# EAGLE board T35_ROMBOARD_v1.10 (EAGLE 6.4)
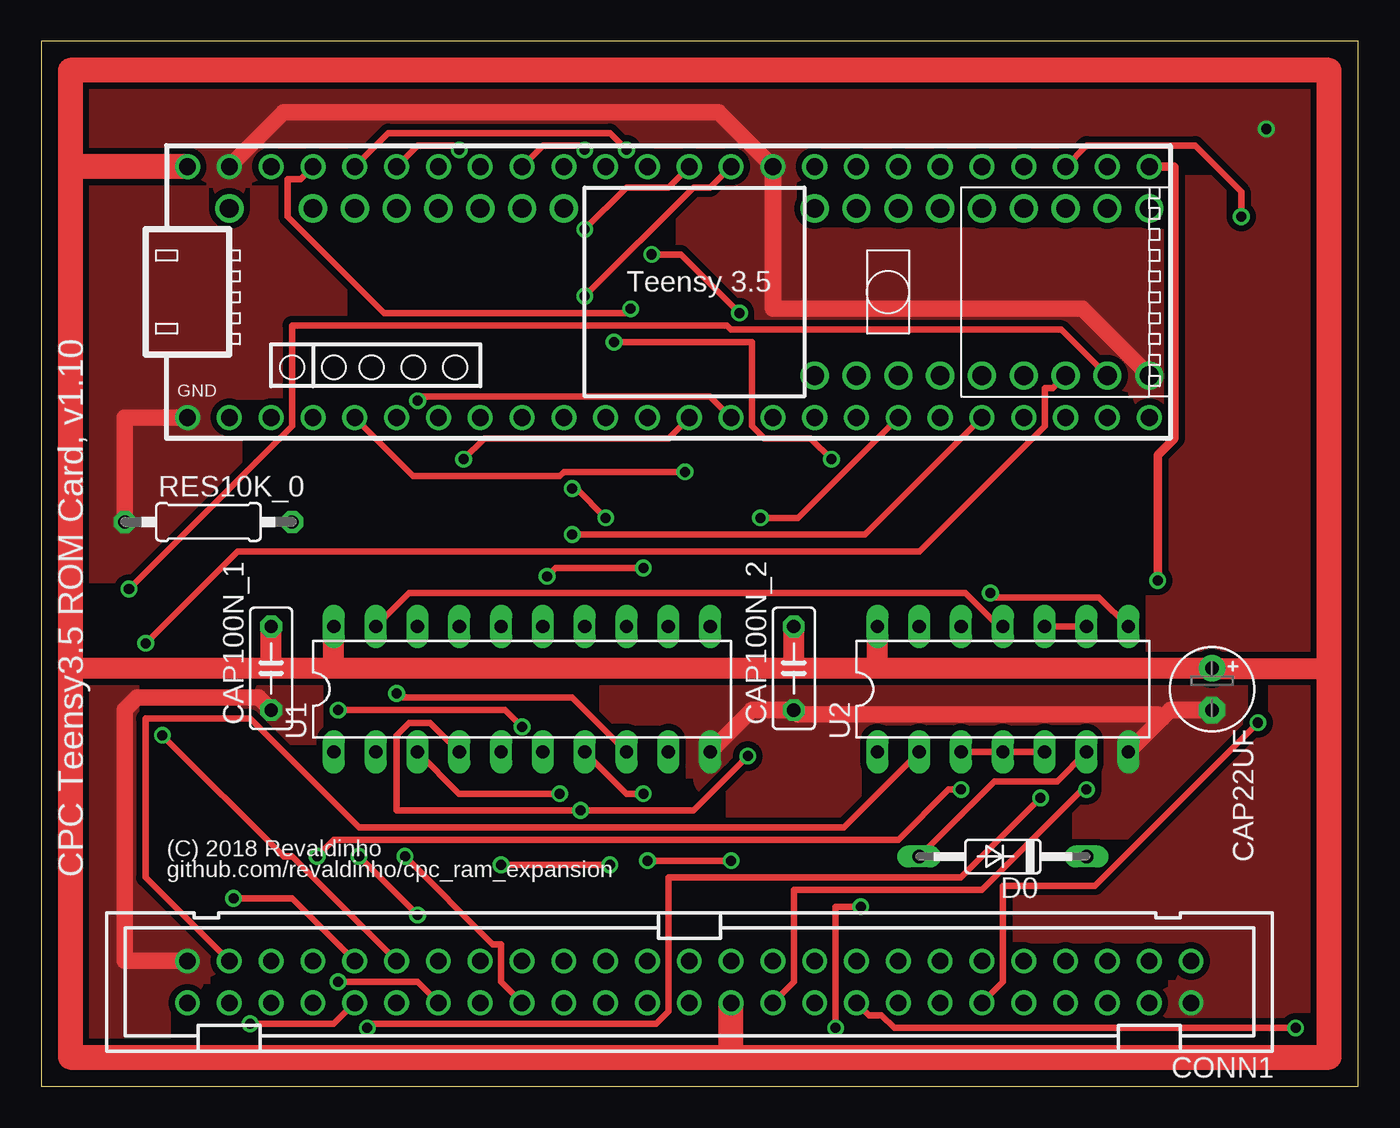
[diagram p0: board, top side]
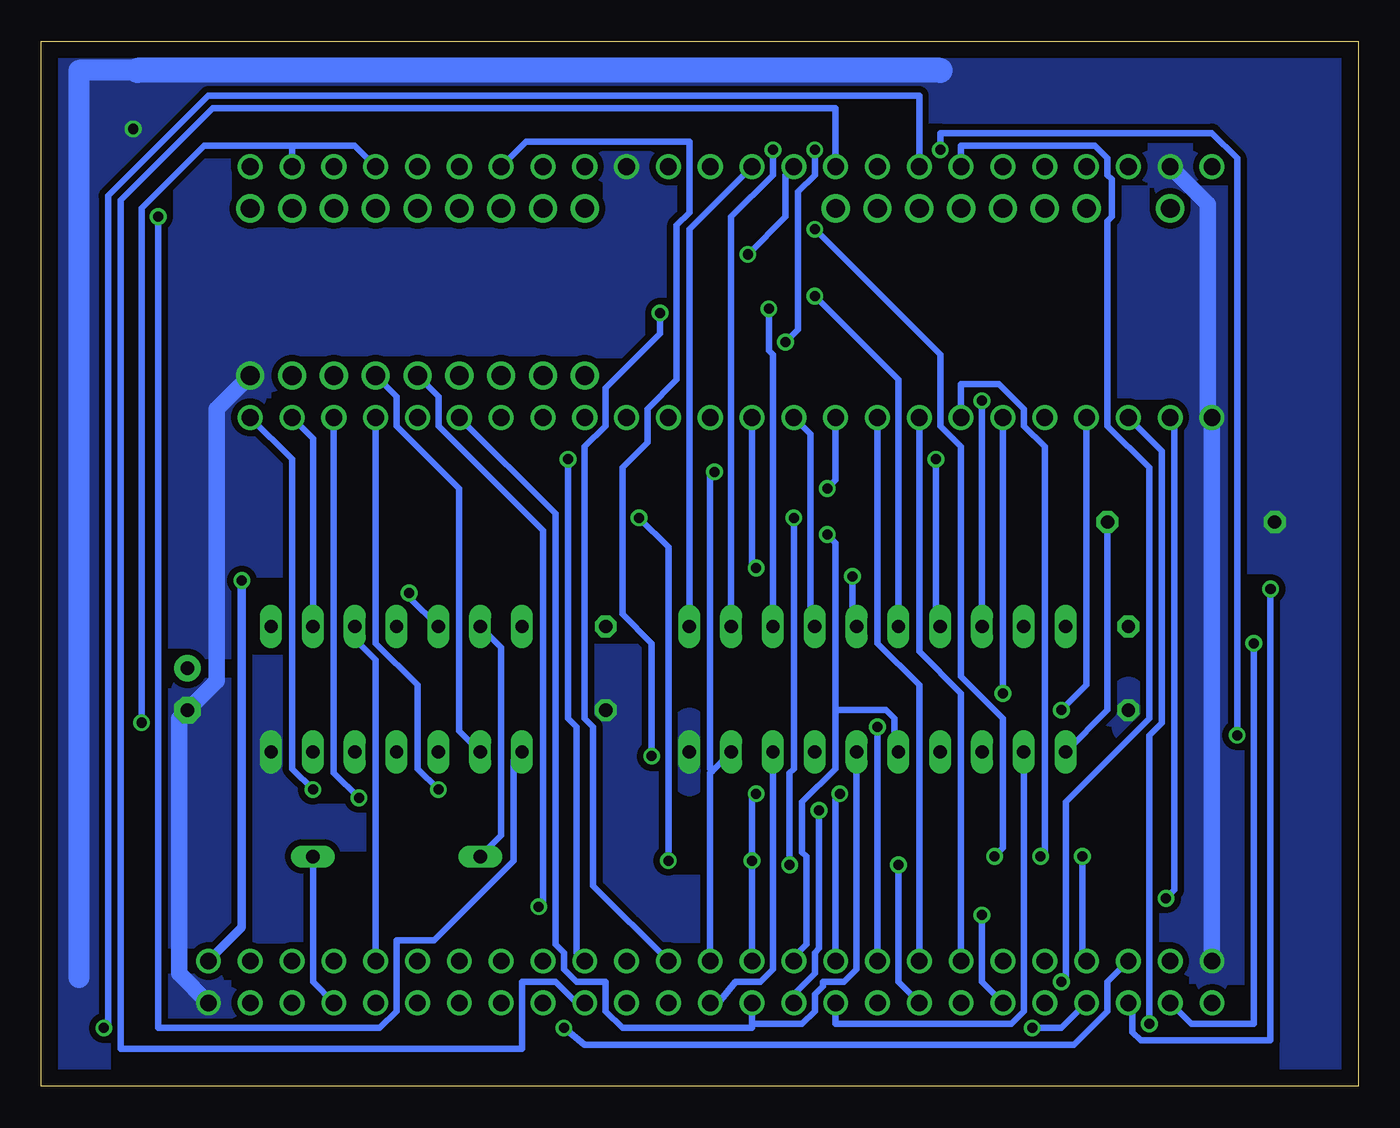
[diagram p1: board, bottom side, seen from below]

Size 80.01 x 63.5 mm. Coordinates in mm from the lower left corner, seen from the top.
Outline: 0,0 80.01,0 80.01,63.5 0,63.5 0,0
Copper layers (1*16): Top 0.035mm / dielectric 1.5mm / Bottom 0.035mm
Design rules "default": minimum track width 10mil, minimum drill 24mil, track to track 8mil, track to pad 8mil, pad to pad 8mil, via to via 8mil, smd to smd 8mil, copper to edge 40mil, drill to drill 8mil, minimum pad ring 10mil, minimum via ring 8mil, stop-mask expansion 4mil, vias tented up to drill 0mil, thermal gap 10mil
Net classes: 0 signal: width 0.381 mm, clearance 0.254 mm; 1 supply: width 1.016 mm, clearance 0.381 mm

## Footprints (pad centres in the part's own frame; a part is rotated, then mirrored left to right if it is on the bottom)
E2,5-5 = drill 0.813 pad 1.6: + -1.27,0 | drill 0.813 pad 1.6 octagon: - 1.27,0
C050-025X075 = drill 0.813 octagon: 1 -2.54,0; 2 2.54,0
PAK100/2500-50 = drill 1 pad 1.422: 1 -30.48,-1.27; 2 -30.48,1.27; 3 -27.94,-1.27; 4 -27.94,1.27; 5 -25.4,-1.27; 6 -25.4,1.27; 7 -22.86,-1.27; 8 -22.86,1.27; 9 -20.32,-1.27; 10 -20.32,1.27; 11 -17.78,-1.27; 12 -17.78,1.27; 13 -15.24,-1.27; 14 -15.24,1.27; 15 -12.7,-1.27; 16 -12.7,1.27; 17 -10.16,-1.27; 18 -10.16,1.27; 19 -7.62,-1.27; 20 -7.62,1.27; 21 -5.08,-1.27; 22 -5.08,1.27; 23 -2.54,-1.27; 24 -2.54,1.27; 25 0,-1.27; 26 0,1.27; 27 2.54,-1.27; 28 2.54,1.27; 29 5.08,-1.27; 30 5.08,1.27; 31 7.62,-1.27; 32 7.62,1.27; 33 10.16,-1.27; 34 10.16,1.27; 35 12.7,-1.27; 36 12.7,1.27; 37 15.24,-1.27; 38 15.24,1.27; 39 17.78,-1.27; 40 17.78,1.27; 41 20.32,-1.27; 42 20.32,1.27; 43 22.86,-1.27; 44 22.86,1.27; 45 25.4,-1.27; 46 25.4,1.27; 47 27.94,-1.27; 48 27.94,1.27; 49 30.48,-1.27; 50 30.48,1.27
DO35-10 = drill 0.813 long: A 5.08,0; C -5.08,0
0207/10 = drill 0.813 octagon: 1 -5.08,0; 2 5.08,0
TEENSY_35_NOXPINS = drill 1.016: 3V3 7.62,-7.62; 3V3_250MA -22.86,7.62; AGND -25.4,7.62; DAC0 12.7,7.62; DAC1 10.16,7.62; GND -27.94,-7.62; GND2 7.62,7.62; P0 -25.4,-7.62; P1 -22.86,-7.62; P2 -20.32,-7.62; P3 -17.78,-7.62; P4 -15.24,-7.62; P5 -12.7,-7.62; P6 -10.16,-7.62; P7 -7.62,-7.62; P8 -5.08,-7.62; P9 -2.54,-7.62; P10 0,-7.62; P11 2.54,-7.62; P12 5.08,-7.62; P13 5.08,7.62; P14 2.54,7.62; P15 0,7.62; P16 -2.54,7.62; P17 -5.08,7.62; P18 -7.62,7.62; P19 -10.16,7.62; P20 -12.7,7.62; P21 -15.24,7.62; P22 -17.78,7.62; P23 -20.32,7.62; P24 10.16,-7.62; P25 12.7,-7.62; P26 15.24,-7.62; P27 17.78,-7.62; P28 20.32,-7.62; P29 22.86,-7.62; P30 25.4,-7.62; P31 27.94,-7.62; P32 30.48,-7.62; P33 30.48,7.62; P34 27.94,7.62; P35 25.4,7.62; P36 22.86,7.62; P37 20.32,7.62; P38 17.78,7.62; P39 15.24,7.62; VIN -27.94,7.62 | drill 1.143: 3V3_1 30.48,5.08; A10 -17.78,5.08; A11 -15.24,5.08; AREF -20.32,5.08; GND5 30.48,-5.08; NC1 17.78,5.08; NC2 17.78,-5.08; P40 10.16,-5.08; P41 12.7,-5.08; P42 15.24,-5.08; P43 20.32,-5.08; P44 22.86,-5.08; P45 25.4,-5.08; P46 27.94,-5.08; P47 27.94,5.08; P48 25.4,5.08; P49 22.86,5.08; P50 20.32,5.08; P51 15.24,5.08; P52 12.7,5.08; P53 10.16,5.08; P54 -5.08,5.08; P55 -7.62,5.08; P56 -10.16,5.08; P57 -12.7,5.08; VUSB -25.4,5.08
DIL20 = drill 0.813 long: 1 -11.43,-3.81; 2 -8.89,-3.81; 3 -6.35,-3.81; 4 -3.81,-3.81; 5 -1.27,-3.81; 6 1.27,-3.81; 7 3.81,-3.81; 8 6.35,-3.81; 9 8.89,-3.81; 10 11.43,-3.81; 11 11.43,3.81; 12 8.89,3.81; 13 6.35,3.81; 14 3.81,3.81; 15 1.27,3.81; 16 -1.27,3.81; 17 -3.81,3.81; 18 -6.35,3.81; 19 -8.89,3.81; 20 -11.43,3.81
DIL14 = drill 0.813 long: 1 -7.62,-3.81; 2 -5.08,-3.81; 3 -2.54,-3.81; 4 0,-3.81; 5 2.54,-3.81; 6 5.08,-3.81; 7 7.62,-3.81; 8 7.62,3.81; 9 5.08,3.81; 10 2.54,3.81; 11 0,3.81; 12 -2.54,3.81; 13 -5.08,3.81; 14 -7.62,3.81

## Placement (x,y rotation side)
CAP22UF  [E2,5-5]  71.12,24.13 270 top
CAP100N_1  [C050-025X075]  13.97,25.4 90 top
CAP100N_2  [C050-025X075]  45.72,25.4 90 top
CONN1  [PAK100/2500-50]  39.37,6.35 180 top
D0  [DO35-10]  58.42,13.97 180 top
RES10K_0  [0207/10]  10.16,34.29 0 top
U0  [TEENSY_35_NOXPINS]  36.83,48.26 0 top
U1  [DIL20]  29.21,24.13 0 top
U2  [DIL14]  58.42,24.13 0 top

## Library data of the parts
CAP22UF CAP100N_1 CAP100N_2 RES10K_0 = resistor
CONN1 = con-3m
D0 = diode
U0 = Teensy35
U1 U2 = ic-package

## Nets
A0: CONN1.33 U0.P2
A1: CONN1.34 U0.P14
A2: CONN1.35 U0.P7
A3: CONN1.36 U0.P8
A4: CONN1.37 U0.P6
A5: CONN1.38 U0.P20
A6: CONN1.39 U0.P21
A7: CONN1.40 U0.P5
A8: CONN1.41 U0.P0
A9: CONN1.42 U0.P1
A10: CONN1.43 U0.P29
A11: CONN1.44 U0.P30
A12: CONN1.45 U0.P43
A13: CONN1.46 U0.P46
A14: CONN1.47 U0.P44 U2.2
A15: CONN1.48 U0.P45
BUFOE_B: U1.19 U2.11
BUSACK_B: CONN1.13
BUSRESET_B: CONN1.11
BUSRQ_B: CONN1.14
CLK: CONN1.1 U0.P33
CURSOR: CONN1.5
D0: CONN1.25 U0.P3 U1.9
D1: CONN1.26 U0.P4 U1.8
D2: CONN1.27 U0.P26 U1.7
D3: CONN1.28 U0.P27 U1.6
D4: CONN1.29 U0.P28 U1.5
D5: CONN1.30 U0.P39 U1.4
D6: CONN1.31 U1.3
D7: CONN1.32 U1.2
DOUT0: U0.P15 U1.11
DOUT1: U0.P22 U1.12
DOUT2: U0.P23 U1.13
DOUT3: U0.P9 U1.14
DOUT4: U0.P10 U1.15
DOUT5: U0.P13 U1.16
DOUT6: U0.P11 U1.17
DOUT7: U0.P12 U1.18
EXP_B: CONN1.3
HALT_B: CONN1.17
INT_B: CONN1.16
IOREQ_B: CONN1.20 U0.P17
LPEN: CONN1.4
M1_B: CONN1.22 U0.P32
MREQ_B: CONN1.23 U0.P16
NMI_B: CONN1.15
RAMDIS: CONN1.6
RAMRD_B: CONN1.7
RD_B: CONN1.19 U0.P18
READY: CONN1.12 U0.P34 U0.P36
RESET_B: CONN1.10
RFSH_B: CONN1.21
ROMDIS: CONN1.8 D0.C
ROMDIS_B: U2.3 U2.4 U2.5
ROMDIS_PRE: D0.A U2.6 U2.13
ROMEN: U2.8 U2.12
ROMEN_B: CONN1.9 U0.P31 U2.9 U2.10
ROMVALID: U0.P35 U2.1
SOUND: CONN1.50
VDD [supply]: CAP22UF.+ CAP100N_1.2 CAP100N_2.2 CONN1.24 U0.VIN U1.20 U2.14
VSS [supply]: CAP22UF.- CAP100N_1.1 CAP100N_2.1 CONN1.2 CONN1.49 RES10K_0.1 U0.AGND U0.GND U0.GND2 U0.GND5 U1.10 U2.7
VSS_PULLDOWN: RES10K_0.2 U1.1
WR_B: CONN1.18 U0.P19

## Tracks (layer width: path | path; a pad name or v marks a point on that pad's centre or on a via)
A0  (via drill 0.61)
  Top 0.381: v29.21,21.84 28.19,22.86 v18.03,22.86
  Bottom 0.381: v29.21,21.84 CONN1.33 | v18.03,22.86 16.51,24.38 U0.P2
A1  (via drill 0.61)
  Top 0.381: CONN1.34 27.94,6.35 27.94,8.64 27.43,8.64 v22.1,13.97 | v33.02,52.07 35.56,54.61 38.1,54.61 U0.P14
  Bottom 0.381: v22.1,13.97 21.59,14.48 21.59,22.35 24.13,24.89 24.13,38.86 25.4,40.13 25.4,44.45 v33.02,52.07
A2
  Bottom 0.381: CONN1.35 26.67,24.38 29.21,26.92 U0.P7
A3  (via drill 0.61)
  Top 0.381: v34.54,13.46 v27.94,13.46 | v34.29,34.54 32.51,36.32 v32.26,36.32
  Bottom 0.381: CONN1.36 27.94,6.35 v27.94,13.46 | v34.54,13.46 34.54,19.05 34.29,19.3 v34.29,34.54 | v32.26,36.32 31.75,36.83 U0.P8
A4
  Bottom 0.381: CONN1.37 24.13,23.88 26.67,26.42 U0.P6
A5  (via drill 0.61)
  Top 0.381: CONN1.38 22.86,6.35 v18.03,6.35
  Bottom 0.381: v18.03,6.35 17.78,6.6 17.78,17.27 12.7,22.35 12.7,37.59 15.24,40.13 15.24,52.58 14.99,52.83 14.99,55.12 15.24,55.37 15.24,56.39 16,57.15 24.13,57.15 U0.P20
A6  (via drill 0.61)
  Top 0.381: CONN1.39 15.24,13.97 14.73,13.97 v7.37,21.34 | v25.4,56.9 25.15,57.15 22.86,57.15 U0.P21
  Bottom 0.381: v7.37,21.34 7.37,56.39 8.89,57.91 25.4,57.91 v25.4,56.9
A7  (via drill 0.61)
  Top 0.381: v19.3,13.97 v22.86,10.41
  Bottom 0.381: CONN1.40 22.86,6.35 v22.86,10.41 | v19.3,13.97 19.05,14.22 19.05,38.86 20.32,40.13 20.32,41.15 21.84,42.67 24.13,42.67 U0.P5
A8  (via drill 0.61)
  Top 0.381: CONN1.41 15.24,11.43 v11.68,11.43
  Bottom 0.381: v11.68,11.43 11.18,11.94 11.18,40.39 U0.P0
A9  (via drill 0.61)
  Top 0.381: CONN1.42 17.78,3.81 v12.7,3.81
  Bottom 0.381: v12.7,3.81 12.7,21.34 11.94,22.1 11.94,38.61 U0.P1
A10  (via drill 0.61)
  Top 0.381: v16.76,13.97 17.78,14.99 52.07,14.99 55.12,18.03 v55.88,18.03
  Bottom 0.381: CONN1.43 16.76,7.87 v16.76,13.97 | v55.88,18.03 57.15,19.3 57.15,24.38 59.69,26.92 U0.P29
A11  (via drill 0.61)
  Top 0.381: v19.81,3.56 20.07,3.81 37.34,3.81 38.1,4.57 38.1,12.7 55.88,12.7 v60.71,17.53
  Bottom 0.381: CONN1.44 18.03,3.56 v19.81,3.56 | v60.71,17.53 62.23,19.05 U0.P30
A12  (via drill 0.61)
  Top 0.381: v48.26,3.56 48.26,10.92 v49.78,10.92
  Bottom 0.381: CONN1.45 15.24,6.35 15.24,4.57 17.27,2.54 46.99,2.54 v48.26,3.56 | v49.78,10.92 49.53,11.18 49.53,33.78 55.88,40.13 55.88,41.91 U0.P43
A13  (via drill 0.61)
  Top 0.381: v5.33,30.23 15.24,40.13 15.24,46.23 41.66,46.23 41.91,45.97 61.98,45.97 U0.P46
  Bottom 0.381: CONN1.46 13.72,4.83 13.72,3.3 13.21,2.79 5.33,2.79 v5.33,30.23
A14
  Top 0.381: CONN1.47 6.35,12.7 6.35,22.35 12.7,22.35 19.3,15.75 48.77,15.75 U2.2
  Bottom 0.381: U2.2 54.61,21.59 54.61,36.32 58.42,40.13 58.42,41.91 U0.P44
A15  (via drill 0.61)
  Top 0.381: v6.35,26.92 11.94,32.51 53.34,32.51 60.96,40.13 60.96,42.42 61.47,42.42 U0.P45
  Bottom 0.381: CONN1.48 10.16,3.81 6.35,3.81 v6.35,26.92
BUFOE_B
  Top 0.381: U1.19 22.35,29.97 56.13,29.97 58.17,27.94 U2.11
CLK  (via drill 0.61)
  Top 0.508: v67.82,30.73 67.82,38.35 68.83,39.37 68.83,55.88 U0.P33
  Bottom 0.508: CONN1.1 67.82,9.65 v67.82,30.73
D0  (via drill 0.61)
  Top 0.381: U0.P3 22.61,37.08 31.5,37.08 31.75,37.34 v39.12,37.34
  Bottom 0.381: 39.24,19.18 39.37,19.05 CONN1.25 | 39.24,19.18 U1.9 | v39.12,37.34 39.37,37.08 39.37,19.3 39.24,19.18
D1  (via drill 0.61)
  Top 0.381: v21.59,23.88 21.84,23.62 32.26,23.62 U1.8
  Bottom 0.381: U1.8 35.56,7.11 36.32,6.35 37.85,6.35 38.86,5.08 CONN1.26 | v21.59,23.88 U0.P4
D2  (via drill 0.61)
  Top 0.381: U1.7 35.56,17.78 v36.58,17.78 | U0.P26 45.97,34.54 v43.69,34.54 | v36.83,13.72 v41.91,13.72
  Bottom 0.381: v36.58,17.78 36.83,17.53 v36.83,13.72 CONN1.27 | v43.69,34.54 41.91,32.77 v41.91,13.72
D3
  Bottom 0.381: U1.6 30.48,7.11 31.24,6.35 32.51,6.35 32.51,6.1 33.02,5.59 33.02,4.57 33.78,3.81 36.83,3.81 | CONN1.28 36.83,3.81 | U0.P27 48.77,34.8 48.77,8.64 48.26,8.13 48.26,7.11 47.5,6.35 45.72,6.35 45.72,4.57 44.7,3.56 36.83,3.56 36.83,3.81
D4  (via drill 0.61)
  Top 0.381: U0.P28 50.04,33.53 v32.26,33.53
  Bottom 0.381: U1.5 28.19,20.57 28.19,22.35 28.7,22.86 31.75,22.86 | 31.75,22.86 31.75,19.3 33.78,17.27 33.78,14.22 33.53,13.97 33.53,8.64 34.29,7.87 CONN1.29 | v32.26,33.53 31.75,33.02 31.75,22.86
D5  (via drill 0.61)
  Top 0.381: U1.4 23.62,22.1 22.35,22.1 21.59,21.34 21.59,16.76 v32.77,16.76 39.62,16.76 v42.93,20.07
  Bottom 0.381: v32.77,16.76 32.77,8.38 33.02,8.13 33.02,6.86 34.29,5.59 CONN1.30 | U0.P39 50.55,57.4 40.64,57.4 40.64,53.09 41.4,52.32 41.4,42.93 43.18,41.15 43.18,39.12 44.7,37.59 44.7,28.7 42.93,26.92 v42.93,20.07
D6  (via drill 0.61)
  Top 0.381: U1.3 25.4,17.78 v31.5,17.78
  Bottom 0.381: v31.5,17.78 31.75,17.53 CONN1.31
D7
  Bottom 0.381: U1.2 20.32,4.57 21.08,3.81 31.75,3.81 CONN1.32
DOUT0
  Bottom 0.381: U1.11 40.64,52.07 U0.P15
DOUT1  (via drill 0.61)
  Top 0.381: v35.56,56.9 34.54,57.91 21.08,57.91 U0.P22
  Bottom 0.381: U1.12 38.1,52.83 35.56,55.37 v35.56,56.9
DOUT2  (via drill 0.61)
  Top 0.381: v35.81,47.24 35.56,46.99 20.83,46.99 14.99,52.83 14.99,55.12 15.75,55.12 U0.P23
  Bottom 0.381: U1.13 35.56,44.45 35.81,44.7 v35.81,47.24
DOUT3
  Bottom 0.381: U1.14 33.27,28.19 33.27,39.62 U0.P9
DOUT4  (via drill 0.61)
  Top 0.381: v30.73,30.99 31.24,31.5 v36.58,31.5
  Bottom 0.381: U1.15 30.73,28.19 v30.73,30.99 | v36.58,31.5 36.83,31.75 U0.P10
DOUT5  (via drill 0.61)
  Top 0.381: v33.02,48.01 39.62,54.61 40.64,54.61 U0.P13
  Bottom 0.381: U1.16 27.94,42.93 v33.02,48.01
DOUT6  (via drill 0.61)
  Top 0.381: v25.65,38.1 26.92,39.37 38.1,39.37 U0.P11
  Bottom 0.381: U1.17 25.65,28.19 v25.65,38.1
DOUT7  (via drill 0.61)
  Top 0.381: v22.86,41.66 23.11,41.91 40.64,41.91 U0.P12
  Bottom 0.381: v22.86,41.66 U1.18
IOREQ_B
  Bottom 0.381: CONN1.20 47.5,5.08 48.77,6.35 50.8,6.35 50.8,2.29 75.18,2.29 75.18,53.85 69.6,59.44 31.75,59.44 U0.P17
M1_B  (via drill 0.61)
  Top 0.381: CONN1.22 45.72,6.35 45.72,11.94 57.15,11.94 63.25,18.03 v63.5,18.03
  Bottom 0.381: v63.5,18.03 64.77,19.3 64.77,38.1 U0.P32
MREQ_B  (via drill 0.61)
  Top 0.381: v42.42,46.99 38.86,50.55 v37.08,50.55
  Bottom 0.381: CONN1.23 46.48,12.19 46.48,21.84 46.99,22.35 46.99,38.86 45.72,40.13 45.72,42.42 42.42,45.72 v42.42,46.99 | v37.08,50.55 34.8,52.83 34.8,55.37 U0.P16
RD_B  (via drill 0.61)
  Top 0.381: v48.01,38.1 46.74,39.37 43.94,39.37 43.18,40.13 43.18,45.21 v34.8,45.21 | v33.02,56.9 32.77,57.15 30.48,57.15 U0.P18
  Bottom 0.381: CONN1.19 47.5,8.13 47.5,21.84 48.01,22.35 v48.01,38.1 | v34.8,45.21 34.04,45.97 34.04,54.36 33.02,55.37 v33.02,56.9
READY  (via drill 0.61)
  Top 0.381: CONN1.12 58.42,6.35 58.42,12.19 64.01,12.19 v73.91,22.1
  Bottom 0.381: v73.91,22.1 73.91,53.34 70.1,57.15 64.77,57.15 | U0.P34 64.77,57.15 | U0.P36 60.96,57.15 64.77,57.15
ROMDIS
  Bottom 0.381: D0.C 63.5,6.35 CONN1.8
ROMDIS_B
  Top 0.381: U2.3 U2.4 U2.5
ROMDIS_PRE
  Top 0.381: D0.A 57.91,18.54 61.72,18.54 U2.6
  Bottom 0.381: U2.13 52.07,26.67 52.07,15.24 D0.A
ROMEN  (via drill 0.61)
  Top 0.381: v57.66,29.97 57.91,29.72 64.26,29.72 U2.8
  Bottom 0.381: U2.12 57.66,29.72 v57.66,29.97
ROMEN_B
  Top 0.381: U2.9 U2.10
  Bottom 0.381: CONN1.9 59.69,25.91 60.96,27.18 U2.10 | U0.P31 63.5,39.37 U2.9
ROMVALID  (via drill 0.61)
  Top 0.381: v72.9,52.83 72.9,54.36 70.1,57.15 63.5,57.15 U0.P35
  Bottom 0.381: U2.1 51.31,19.81 51.31,13.72 56.13,8.89 58.42,8.89 58.42,4.57 59.44,3.56 72.9,3.56 v72.9,52.83
VDD
  Top 1.27: 50.8,25.4 CAP22UF.+ 78.23,25.4 | 50.8,25.4 45.72,25.4 | 45.72,25.4 17.78,25.4 | 17.78,25.4 13.97,25.4 | 13.97,25.4 1.78,25.4 | 13.97,25.4 CAP100N_1.2 | 17.78,25.4 U1.20 | 45.72,25.4 CAP100N_2.2 | 50.8,25.4 U2.14
  Top 1.524: 1.78,55.88 1.78,61.72 78.23,61.72 78.23,25.4 78.23,1.78 41.91,1.78 | 1.78,55.88 1.78,25.4 1.78,1.78 41.91,1.78 | U0.VIN 1.78,55.88 | 41.91,1.78 CONN1.24
VSS  (via drill 0.61)
  Top 1.016: RES10K_0.1 5.08,40.64 U0.GND | U0.GND5 63.25,47.24 44.45,47.24 U0.GND2 41.15,59.18 14.73,59.18 U0.AGND | U1.10 43.18,22.86 CAP100N_2.1 45.97,22.61 67.82,22.61 68.07,22.35 | 68.07,22.35 68.58,22.86 CAP22UF.- | 68.07,22.35 U2.7 | CAP100N_1.1 13.21,23.62 5.84,23.62 5.08,22.86 5.08,7.62 CONN1.49
  Bottom 1.016: CONN1.49 U0.GND 9.14,40.89 9.14,53.59 U0.AGND | CONN1.2 71.63,6.86 71.63,22.35 CAP22UF.- 69.34,24.64 69.34,41.15 U0.GND5 | 74.17,61.47 74.17,61.72
  Bottom 1.27: 74.17,61.72 77.72,61.72 77.72,6.6
  Bottom 1.524: 25.4,61.72 74.17,61.72
  other vias: 74.42,58.17
  pour Top: 0,0 0,63.5 80.01,63.5 80.01,0
  pour Bottom: 0,0 0,63.5 80.01,63.5 80.01,0
VSS_PULLDOWN
  Bottom 0.381: U1.1 15.24,22.86 RES10K_0.2
WR_B  (via drill 0.61)
  Top 0.381: CONN1.18 50.29,4.32 51.05,4.32 51.82,3.56 v76.2,3.56
  Bottom 0.381: v76.2,3.56 75.95,3.81 75.95,54.1 69.85,60.2 26.67,60.2 U0.P19

## Text on the board
tPlace: (C) 2018 Revaldinho | CPC Teensy3.5 ROM Card, v1.10 | github.com/revaldinho/cpc_ram_expansion